# Altium PCB PCB1.PcbDoc
Units mm, origin at the board's own origin, x right, y up, seen from the top; angles counter-clockwise.
Board outline 55 x 25 mm, 2 copper layers (Top Layer, Bottom Layer), stack 1.534 mm thick; 53 components, 42 nets, 188 pads, 70 vias.
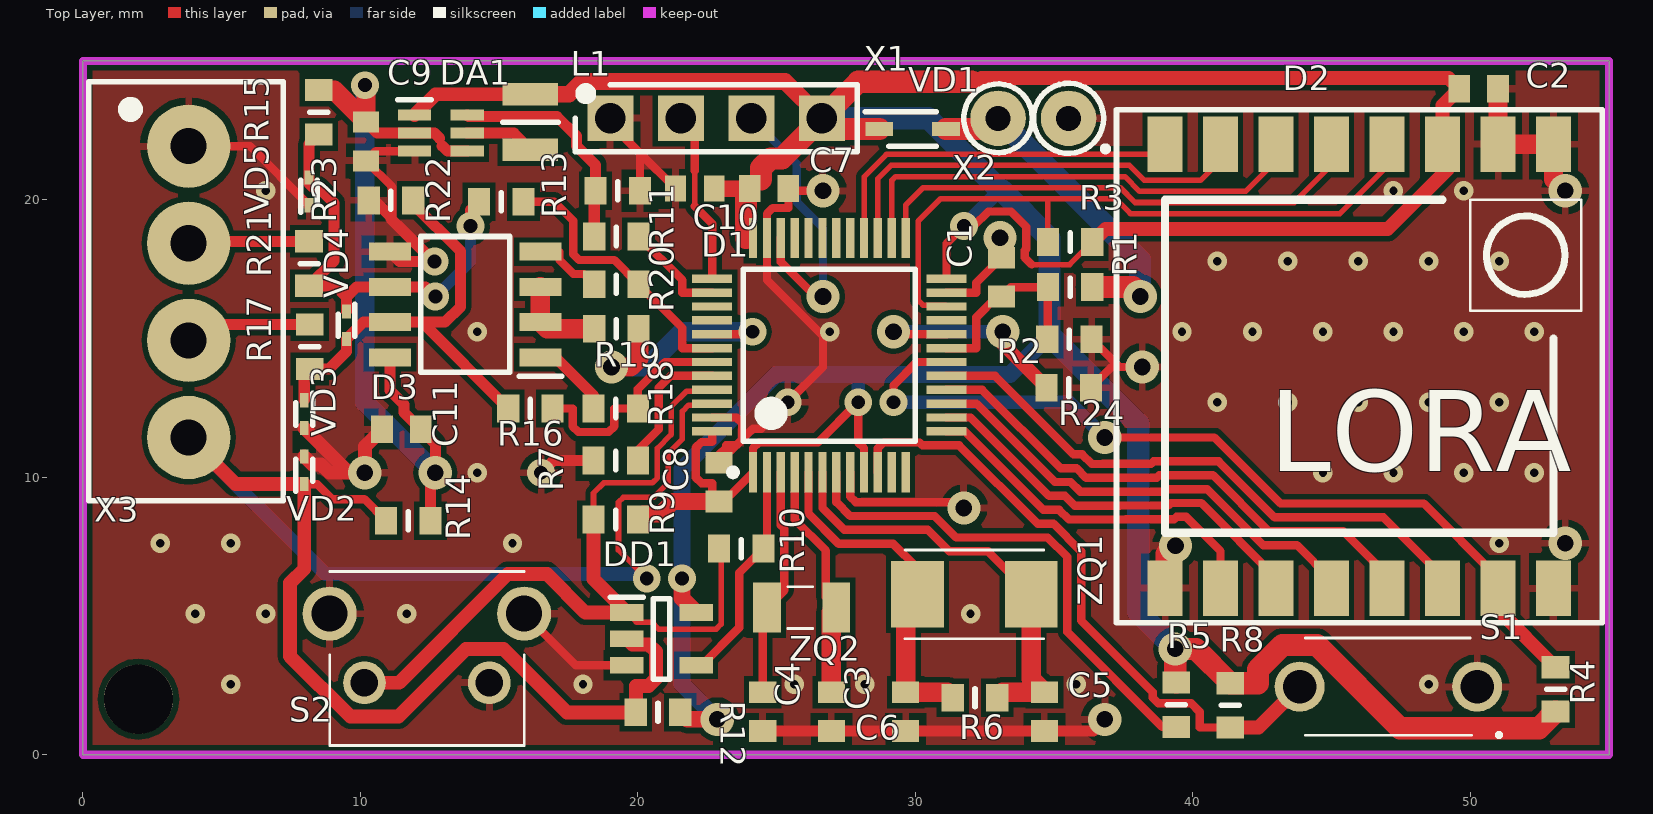
[diagram p0: Top Layer view]
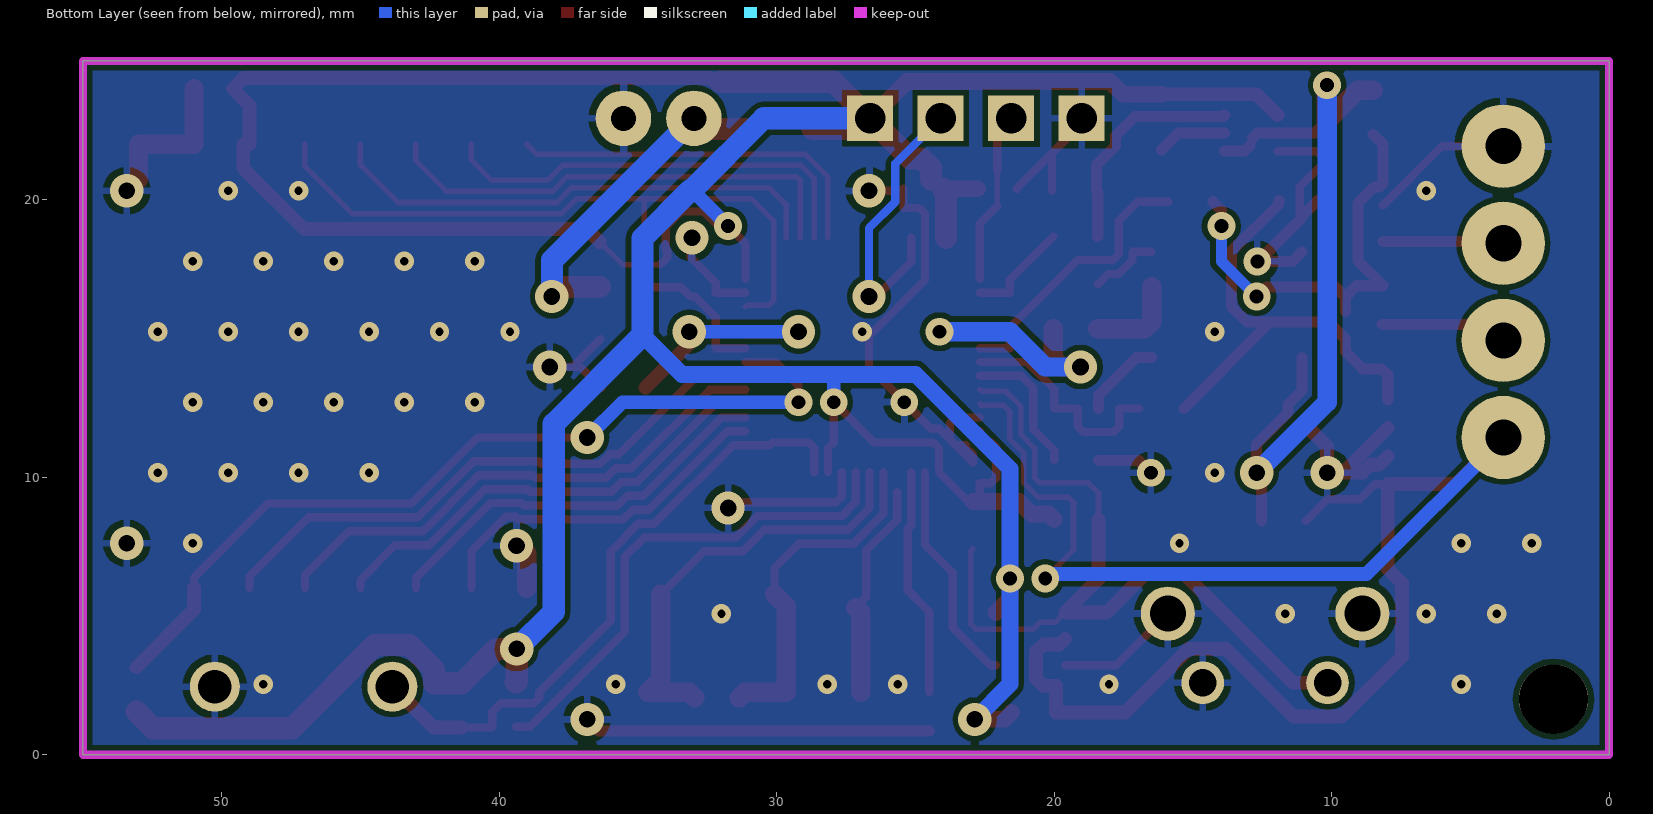
[diagram p1: Bottom Layer view, seen from below]

## Layer stack, top to bottom
Top Solder: solder mask 0.0102, Solder Resist, Dk 3.5
Top Layer: signal copper 0.035
Dielectric 1: dielectric 1.464, FR-4, Dk 4.8
Bottom Layer: signal copper 0.035
Bottom Solder: solder mask 0.0102, Solder Resist, Dk 3.5

## Board outline
0,0 0,25 55,25 55,0

## Design rules (kind name [scope] priority, off if disabled: settings)
Clearance [All] p1: gap=0.2 ignorepadtopadclearanceinfootprint=FALSE except(0: Arc-Hole Track-Hole SMDPad-Hole THPad-Hole Via-Hole Fill-Hole Poly-Hole Region-Hole Text-Hole)
PolygonConnect [All] p1: connectstyle=Relief reliefconductorwidth=0.254 reliefentries=4 polygonreliefangle="90 Angle" airgapwidth=0.254
RoutingVias [All] p1: holewidth=0.711 width=1.27 viastyle="Through Hole" minholewidth=0.3 minwidth=0.6 maxholewidth=0.711 maxwidth=1.27
SolderMaskExpansion [All] p1: expansion=0.15
Width [All] p1: maxlimit=2 minlimit=0.2 preferedwidth=1
30 further rules are at their usual default settings.

## Components (designator, comment, footprint, x,y, rotation, side; value= is the part's Value field where it differs from the comment)
C1 "100nF" CAPC1608X87N 33.1,17.21 r90 top
C2 "100nF" CAPC1608X87N 50.3,24 r180 top
C3 "9pF" CAPC1608X87N 26.975,1.55 r90 top
C4 "9pF" CAPC1608X87N 24.5,1.55 r90 top
C5 "18pF" CAPC1608X87N 34.65,1.55 r90 top
C6 "18pF" CAPC1608X87N 29.65,1.55 r90 top
C7 "100nF" CAPC1608X87N 24.725,20.4 r0 top
C8 "100nF" CAPC1608X87N 22.925,9.825 r90 top
C9 "10uF" CAPC1608X90N 10.2,22.1 r90 top
C10 "10uF" CAPC1608X90N 22.05,20.4 r0 top
C11 "100nF" CAPC1608X87N 11.475,11.725 r0 top
D1 "STM32L072CBT6" LQFP-48N 26.9,14.4 r90 top
D2 "SX1278" "RA-02 LORA" 46,14 r270 top
D3 "ST485CDR" SOIC127P600X175-8N 13.775,16.225 r180 top
DA1 "TPS61222DCKR" SOT65P210X110-6N 12.9,22.4 r0 top
DD1 "SN74AUP1G08DBVR" SOT95P280X145-5N 20.85,4.175 r0 top
L1 "4.7uH" 1239ASH100MP2 16.125,22.8 r270 top
R1 "10M" R0603 35.575,16.85 r0 top
R2 "10M" R0603 35.55,14.975 r180 top
R3 "10M" R0603 35.575,18.475 r0 top
R4 "10M" R0603 53.075,2.35 r270 top
R5 "10M" R0603 39.4,1.8 r270 top
R6 "10M" R0603 32.15,2.05 r180 top
R7 "10M" R0603 19.2,10.6 r180 top
R8 "10M" R0603 41.35,1.775 r90 top
R9 "10M" R0603 19.2,8.475 r0 top
R10 "0" R0603 23.725,7.425 r180 top
R11 "10" R0603 19.225,18.675 r0 top
R12 "10M" R0603 20.725,1.525 r0 top
R13 "10M" R0603 19.275,20.325 r0 top
R14 "0" R0603 11.725,8.425 r180 top
R15 "47k" R0603 8.5,23.15 r90 top
R16 "0" R0603 16.125,12.475 r180 top
R17 "10" R0603 8.175,14.7 r270 top
R18 "10" R0603 19.2,12.475 r0 top
R19 "10" R0603 19.225,15.35 r0 top
R20 "10" R0603 19.225,16.95 r0 top
R21 "10" R0603 8.15,17.7 r270 top
R22 "0" R0603 15.075,19.925 r180 top
R23 "47k" R0603 11.1,19.975 r0 top
R24 "10M" R0603 35.525,13.225 r0 top
S1 "PTS636_SL43_LFS" PTS636SL43LFS 50.25,2.45 r180 top
S2 "FSMRA6JH" FSMRA6JH 10.145,2.59 r0 top
VD1 "NSVR0320MW2T1G" SOD2512X110N 29.9,22.55 r0 top
VD2 "ESD9B5.0ST5G" SODFL1006X40N 7.975,10.25 r90 top
VD3 "ESD9B5.0ST5G" SODFL1006X40N 7.975,12.275 r270 top
VD4 "ESD9B5.0ST5G" SODFL1006X40N 9.5,15.475 r270 top
VD5 "ESD9B5.0ST5G" SODFL1006X40N 8.15,20.3 r90 top
X1 "Value" HDRV1W64P254_1X4_254X241X838P 19.01,22.935 r0 top
X2 "Connector_2" PAD_CONNECTOR_2 34.25,22.935 r180 top
X3 "*" CONECTOR 3.71,16.755 r270 top
ZQ1 "8MHz" ABM38000MHZD2YT 32.125,5.775 r0 top
ZQ2 "32.768k" CM7VT1A32768KHZ125PF10PPMTBQC 25.9,5.3 r180 top

## Footprints (in the part's own frame and the unit in brackets; to place one, negate y for a bottom-side part, rotate by r counter-clockwise, add the part's x,y. Pads: shape width x height; smd on the part's side, far side on the other; paste and mask are expansions set on the pad)
1239ASH100MP2 [mm]
  rect 0.8x2 smd: 1(-1,0) 2(1,0)
  silkscreen extent 0,-1 0,1, body extent -1.25,-1 1.25,1, height 1.2
ABM38000MHZD2YT [mm]
  rect 1.9x2.4 smd: 1(-2.05,0) 2(2.05,0)
  silkscreen extent -2.5,-1.6 2.5,1.6, body extent -2.81,-1.6 2.81,1.6, height 1.1
CAPC1608X87N [mm]
  rect 0.78x0.98 smd: 1(-0.7,0) 2(0.7,0)
  body extent -0.8,-0.4 0.8,0.4, height 0.87
CAPC1608X90N [mm]
  rect 0.75x0.94 smd: 1(-0.7,0) 2(0.7,0)
  body extent -0.8,-0.4 0.8,0.4, height 0.9
CM7VT1A32768KHZ125PF10PPMTBQC [mm]
  rect 1x1.8 smd: 1(-1.25,0) 2(1.25,0)
  silkscreen extent -0.4,-0.75 0.5,0.75, body extent -1.6,-0.75 1.6,0.75, height 0.65
CONECTOR [mm]
  round 3 hole 1.3: 1(-5.175,0.1) 2(-1.675,0.1) 3(1.825,0.1) 4(5.325,0.1)
  silkscreen extent -7.5,-3.5 7.6,3.5, body extent -7.45,-3.47 7.55,3.53, height 8.3
FSMRA6JH [mm]
  round 1.54 hole 0.99: 1(0,0) 2(4.5,0)
  round 1.95 hole 1.3: MH1(-1.255,2.49) MH2(5.755,2.49)
  silkscreen extent -1.25,-2.26 5.75,4.01, body extent -1.4,-5.61 5.71,3.94, height 7.06
HDRV1W64P254_1X4_254X241X838P [mm]
  rect 1.65x1.65 hole 1.1: 1(0,0) 2(2.54,0) 3(5.08,0) 4(7.62,0)
  silkscreen extent -1.27,-1.2 8.89,1.2, body extent -1.27,-1.2 8.89,1.21, height 8.38
LQFP-48N [mm] "TSQFP, 48-Leads, Body 7,00x7,00mm, Pitch 0,50mm, IPC Medium Density"
  rect 1.45x0.3 smd: 1(-4.225,2.75) 2(-4.225,2.25) 3(-4.225,1.75) 4(-4.225,1.25) 5(-4.225,0.75) 6(-4.225,0.25) 7(-4.225,-0.25) 8(-4.225,-0.75) 9(-4.225,-1.25) 10(-4.225,-1.75) 11(-4.225,-2.25) 12(-4.225,-2.75) 25(4.225,-2.75) 26(4.225,-2.25) 27(4.225,-1.75) 28(4.225,-1.25) 29(4.225,-0.75) 30(4.225,-0.25) 31(4.225,0.25) 32(4.225,0.75) 33(4.225,1.25) 34(4.225,1.75) 35(4.225,2.25) 36(4.225,2.75)
  rect 0.3x1.45 smd: 13(-2.75,-4.225) 14(-2.25,-4.225) 15(-1.75,-4.225) 16(-1.25,-4.225) 17(-0.75,-4.225) 18(-0.25,-4.225) 19(0.25,-4.225) 20(0.75,-4.225) 21(1.25,-4.225) 22(1.75,-4.225) 23(2.25,-4.225) 24(2.75,-4.225) 37(2.75,4.225) 38(2.25,4.225) 39(1.75,4.225) 40(1.25,4.225) 41(0.75,4.225) 42(0.25,4.225) 43(-0.25,4.225) 44(-0.75,4.225) 45(-1.25,4.225) 46(-1.75,4.225) 47(-2.25,4.225) 48(-2.75,4.225)
  silkscreen extent -4.35,-3.1 3.1,3.6, body extent -4.5,-4.5 4.5,4.5, height 1.6
PAD_CONNECTOR_2 [mm]
  round 2 hole 0.9: 1(-1.27,0) 2(1.27,0)
  silkscreen extent -2.7,-1.26 2.5,1.26
PTS636SL43LFS [mm]
  round 1.8 hole 1.2: 1(0,0) 2(6.4,0)
  silkscreen extent -0.83,-1.75 6.2,1.78, body extent -0.15,-1.75 6.65,1.75, height 4.5
R0603 [mm]
  rect 0.8x1 smd: 1(-0.8,0) 2(0.8,0)
  silkscreen extent 0,-0.33 0,0.33, body extent -0.77,-0.42 0.78,0.43, height 0.55
"RA-02 LORA" [mm]
  rect 2x1.25 smd: 1(-8,7) 2(-8,5) 3(-8,3) 4(-8,1) 5(-8,-1) 6(-8,-3) 7(-8,-5) 8(-8,-7) 9(8,-7) 10(8,-5) 11(8,-3) 12(8,-1) 13(8,1) 14(8,3) 15(8,5) 16(8,7)
  round 1 on Top Overlay: 17(-10.25,8.25)
  round 0.7 on Top Overlay: 18(-4,6)
  silkscreen extent -9.25,-8.75 9.25,8.75, body extent -8,-8.5 8,8.5, height 3.2
SOD2512X110N [mm]
  rect 1x0.5 smd: 1(-1.2,0) 2(1.2,0)
  silkscreen extent -1.7,-0.63 0.85,0.63, body extent -1.25,-0.63 1.25,0.63, height 1.1
SODFL1006X40N [mm]
  rect 0.51x0.32 smd: 1(-0.5,0) 2(0.5,0)
  silkscreen extent -0.75,-0.3 0.4,0.3, body extent -0.5,-0.3 0.5,0.3, height 0.4
SOIC127P600X175-8N [mm]
  rect 1.525x0.65 smd: 1(-2.712,1.905) 2(-2.712,0.635) 3(-2.712,-0.635) 4(-2.712,-1.905) 5(2.712,-1.905) 6(2.712,-0.635) 7(2.712,0.635) 8(2.712,1.905)
  silkscreen extent -3.47,-2.45 1.6,2.58, body extent -3,-2.45 3,2.45, height 1.75
SOT65P210X110-6N [mm]
  rect 1.2x0.4 smd: 1(-0.95,0.65) 2(-0.95,0) 3(-0.95,-0.65) 4(0.95,-0.65) 5(0.95,0) 6(0.95,0.65)
  silkscreen extent -1.55,1.2 -0.35,1.2, body extent -1.05,-1 1.05,1, height 1.1
SOT95P280X145-5N [mm]
  rect 1.2x0.6 smd: 1(-1.25,0.95) 2(-1.25,0) 3(-1.25,-0.95) 4(1.25,-0.95) 5(1.25,0.95)
  silkscreen extent -1.85,-1.45 0.3,1.5, body extent -1.4,-1.45 1.4,1.45, height 1.45

## Part data
C1 C2 C7 C8 C11: library part Capacitor, Case=0603, Manufacture="Murata Electronics", helpURL=https://eu.mouser.com/ProductDetail/Murata-Electronics/GCJ188R71C104MA01D?qs=sGAEpiMZZMs0AnBnWHyRQID2xuQsFd1GofHLF%2FZjZNHccNCeYysMBg%3D%3D, Model=GCJ188R71C104MA01D
C3 C4: library part C0603C220F3HACTU, "Capacitor", Case=0603, Manufacturer_Name="Murata Electronics", Manufacturer_Part_Number=GRM1885C1H9R0DA01D, Height=0.87mm, helpURL=https://eu.mouser.com/ProductDetail/Murata-Electronics/GRM1885C1H9R0DA01D?qs=sGAEpiMZZMs0AnBnWHyRQOYRcarA5hN2DPY65XhHy0U%3D, Model=GRM1885C1H9R0DA01D
C5 C6: library part C0603C220F3HACTU, "Capacitor", Case=0603, Manufacturer_Name=Kemet, Mouser2 Part Number=80-C0603C220F3HACTU, Height=0.87mm, helpURL=https://eu.mouser.com/ProductDetail/KEMET/C0603C180F3HACTU?qs=%2Fha2pyFadujq8NkOLYRmmNwJI7kFslpOt8gdR0UiXQGw%2Fa53lDXJFQ%3D%3D, Manufacturer_Part_Number=C0603C220F3HACTU, Model=C0603C220F3HACTU
C9 C10: library part GRM188R60J106ME84J, "Capacitor", Manufacture="Murata Electronics", Mouser2 Part Number=81-GRM188R60J106ME4J, Height=0.9mm, helpURL=https://eu.mouser.com/ProductDetail/Murata-Electronics/GRM188R60J106ME84J?qs=sGAEpiMZZMs0AnBnWHyRQPhvn0V5nV7wdlV22aTabXS5iZ%252BKGPaWdQ%3D%3D, Manufacturer_Name="Murata Electronics", Manufacturer_Part_Number=GRM188R60J106ME84J, Model=GRM188R60J106ME84J
D1: "ARM Cortex M0+, 128 KB,  32 MHz", Case=48-LQFP, Manufacture=ST, helpURL=https://www.st.com/en/microcontrollers-microprocessors/stm32l072cb.htmhttps://www.st.com/en/microcontrollers-microprocessors/stm32l072cb.html, Model=STM32L072CBT6
D2: "Wireless Modules RoHS, Lora, 433 MHz", Case=Customer, Manufacture=Ai-Thinker, helpURL=https://lcsc.com/product-detail/Wireless-Modules_SX1278LoRaWireless-Modules-Long10KM-433_C90039.html, Model=SX1278
D3: "Integrated Circuit", Manufacturer_Name=STMicroelectronics, Mouser2 Part Number=511-ST485CDR, Datasheet Link=https://componentsearchengine.com/Datasheets/1/ST485CDR.pdf, Height=1.75mm, Manufacturer_Part_Number=ST485CDR, Model=ST485CDR, Mouser2 Price/Stock=https://www.mouser.com/Search/Refine.aspx?Keyword=511-ST485CDR
DA1: "Integrated Circuit", Manufacturer_Name="Texas Instruments", Mouser2 Part Number=595-TPS61222DCKR, Datasheet Link=https://www.ti.com/lit/gpn/TPS61222, Height=1.1mm, Manufacturer_Part_Number=TPS61222DCKR, Mouser2 Price/Stock=https://www.mouser.com/Search/Refine.aspx?Keyword=595-TPS61222DCKR
DD1: "Integrated Circuit", Manufacturer_Name="Texas Instruments", Datasheet Link=http://www.ti.com/lit/gpn/sn74aup1g08, Height=1.45mm, Manufacturer_Part_Number=SN74AUP1G08DBVR, Model=SN74AUP1G08DBVR
L1: library part Cooil, Manufacture=Coilcraft, helpURL=https://eu.mouser.com/ProductDetail/Coilcraft/EPL3015-472MLB?qs=sGAEpiMZZMsg%252By3WlYCkU2kWFds1hA9DlWz4EahPFXQ%3D, Model=EPL3015-472MLB
R1 R2 R3 R4 R5 R6 R7 R8 R9 R10 R11 R12 R13 R14 R16 R17 R18 R19 R20 R21 R22 R24: library part Resistor, Case=0603, Manufacture="Vishay / Dale"
  R1 R2 R3 R4 R5 R6 R7 R8 R9 R12 R13 R24: helpURL=https://eu.mouser.com/ProductDetail/Vishay-Dale/CRCW060310M0JNEAC?qs=sGAEpiMZZMtlubZbdhIBIIZe04wfiaJWqGwkA21tjII%3D, Model=CRCW060310M0JNEAC
  R10 R14 R16 R22: helpURL=https://eu.mouser.com/ProductDetail/Vishay-Dale/CRCW06030000Z0EAC?qs=sGAEpiMZZMtlubZbdhIBIIZe04wfiaJWEAUMew4TANc%3D, Model=CRCW06030000Z0EAC
  R11 R17 R18 R19 R20 R21: helpURL=https://eu.mouser.com/ProductDetail/Vishay-Dale/CRCW060310R0FKEAC?qs=sGAEpiMZZMtlubZbdhIBIIZe04wfiaJWxDMmtLhgrug%3D, Model=CRCW060310R0FKEAC
R15 R23: library part Resistor, Case=0603, Manufacture=Yageo, helpURL=https://eu.mouser.com/ProductDetail/Yageo/RC0603FR-0747KL?qs=sGAEpiMZZMtlubZbdhIBIItYu4jZFrq8jA1HT%252B9Khos%3D, Model=RC0603FR-0747KL
S1: "Switch", Manufacturer_Name="C & K COMPONENTS", Manufacturer_Part_Number="PTS636 SL43 LFS", Mouser2 Part Number=611-PTS636SL43LFS, Datasheet Link="https://componentsearchengine.com/Datasheets/1/PTS636 SL43 LFS.pdf", Height=4.5mm, Model="PTS636 SL43 LFS", Mouser2 Price/Stock=https://www.mouser.com/Search/Refine.aspx?Keyword=611-PTS636SL43LFS
S2: "Switch", Manufacturer_Name="TE Connectivity", Height=7.01mm, helpURL=https://eu.mouser.com/ProductDetail/TE-Connectivity-PB/FSMRA6JH?qs=sGAEpiMZZMsgGjVA3toVBAK0o4DxfcqiZ%2FRlJR1iziM%3D, Manufacturer_Part_Number=FSMRA6JH, Model=FSMRA6JH
VD1: "Diode", Manufacturer_Name="ON Semiconductor", Datasheet Link=https://componentsearchengine.com/Datasheets/2/NSVR0320MW2T1G.pdf, Height=1.1mm, helpURL=https://eu.mouser.com/ProductDetail/ON-Semiconductor/NSVR0320MW2T1G?qs=%2Fha2pyFadujuJRQwCWoVTOD2UGuwG1BWdFMULlJZ9zj6n5RYExZtWw%3D%3D, Manufacturer_Part_Number=NSVR0320MW2T1G, Model=NSVR0320MW2T1G
VD2 VD3 VD4 VD5: "Diode", Manufacture="ON Semiconductor", Mouser2 Part Number=863-ESD9B5.0ST5G, Height=0.4mm, helpURL=https://www.mouser.com/Search/Refine.aspx?Keyword=863-ESD9B5.0ST5G, Manufacturer_Name="ON Semiconductor", Manufacturer_Part_Number=ESD9B5.0ST5G, Model=ESD9B5.0ST5G
X1 X3: library part Connector, Case="Terminal Bloak", Manufacture="TE Connectivity AMP Connectors", Part number=1776275-4, helpURL=https://www.digikey.com/product-detail/en/te-connectivity-amp-connectors/1776275-4/A98038-ND/1826901, Model=1776275-4
ZQ1: library part ABM3-8.000MHZ-B4Y-T, "Crystal or Oscillator", Manufacturer_Name=ABRACON, Height=1mm, helpURL=https://eu.mouser.com/ProductDetail/ABRACON/ABM3-8000MHZ-B4Y-T?qs=%252BlF%252B75lapNKxd1hbTYfShQ%3D%3D, Manufacturer_Part_Number=ABM3-8.000MHZ-B4Y-T, Model=ABM3-8.000MHZ-B4Y-T
ZQ2: library part CM7V-T1A-32.768k-9pF-20PPM-TA-QA_T3, "Crystal or Oscillator", Manufacturer_Name="MICRO CRYSTAL", Manufacturer_Part_Number="CM7V-T1A-32.768k-9pF-20PPM-TA-QA T3", Mouser2 Part Number=428-201568-MG03, Height=0.65mm, helpURL=https://eu.mouser.com/ProductDetail/Micro-Crystal/CM7V-T1A-32768k-9pF-20PPM-TA-QA-T3?qs=%2Fha2pyFadui6AXBQ%2FVw18lA%252BLN0M9oEZsmyoRLoeGfq%2FVECMncxUBFCE3nNdh4yClz3k2BoauApbLLycflu%2FdA%3D%3D, Model="CM7V-T1A-32.768k-9pF-20PPM-TA-QA T3", Mouser2 Price/Stock=https://www.mouser.com/Search/Refine.aspx?Keyword=428-201568-MG03

## Free pads (board coordinates)
  round 2.5 hole 2.5: 5(2,2)

## Via types
v1: diameter 0.7, hole 0.3, Top Layer to Bottom Layer, tented both sides, 40 vias
v2: diameter 1.2, hole 0.6, Top Layer to Bottom Layer, tented both sides, 18 vias
v3: diameter 1, hole 0.5, Top Layer to Bottom Layer, tented both sides, 12 vias

## Nets (pads, with @x,y where several pads share a name; then routed paths per layer and width w, separated by ;. In a path a pad name is that pad's centre, name@x,y a point inside that pad or via, vN(x,y) a via of type N, cw(c..) or ccw(c..) an arc to the next point about the centre after c; other vN are vias at no path point)
5V: C9.2 C11.2 D3.8 DA1.2 DA1.4 R14.1 R15.2 | length 29.1
  Top Layer w0.4: C9.2 10.6,22.4 DA1.2 12.666,22.4 12.85,22.216 ; D3.8 11.063,13.117 11.565,12.615 11.565,12.335 C11.2 12.7,11.2 v2(12.7,10.16) 12.525,9.985 R14.1 ; 12.95,21.934 13.134,21.75 DA1.4
  Top Layer w0.7: R15.2 9.05,23.95 C9.2 10.2,24.09 v3(10.16,24.13)
  Bottom Layer w0.7: v3(10.16,24.13) 10.16,12.7 v2(12.7,10.16)
BOOT1: D1.20 R24.1 | length 8.6
  Top Layer w0.3: v2(29.21,15.24) 29.3,15.15 D1.20
  Top Layer w0.5: v2(33.15,15.24) 33.15,14.8 R24.1
  Bottom Layer w0.5: v2(29.21,15.24) v2(33.15,15.24)
COM_PWR_EN: D1.38 R11.2 | length 3.8
  Top Layer w0.3: R11.2 21.6,17.1 21.6,16.65 D1.38
COUNTER: D1.46 DD1.2 R12.1 R14.2 VD2.1 X3.4 | length 61.9
  Top Layer w0.2: v3(20.32,6.35) 19.3,7.37 19.3,9.099 19.476,9.275 20.565,9.275 21.1,9.81 21.1,10.873 21.6,11.373 21.6,12.374 21.826,12.6 22.625,12.6 D1.46
  Top Layer w0.3: VD2.1 8.441,9.75 8.981,9.21 10.14,9.21 R14.2
  Top Layer w0.5: X3.4 5.49,9.75 VD2.1 7.975,6.69 7.465,6.18 7.465,3.545 9.64,1.37 11.365,1.37 13.805,3.81 15.155,3.81 17.44,1.525 R12.1 19.925,2.475 20.386,2.475 20.65,2.739 20.65,3.711 20.386,3.975 19.8,3.975 DD1.2
  Bottom Layer w0.5: X3.4 8.735,6.505 20.165,6.505 v3(20.32,6.35)
GND: C1.2 C2.1 C3.1 C4.1 C5.1 C6.1 C7.2 C8.2 C9.1 C10.1 C11.1 D1.8 D1.23 D1.35 D1.47 D2.1 D2.2 D2.9 D2.16 D3.5 DA1.3 DD1.3 R2.1 R7.2 R13.2 R23.1 R24.2 S1.1 S2.2 S2.MH1 S2.MH2 VD2.2 VD3.2 VD5.1 X1.1 X2.1 X3.1 | length 84.7
  Top Layer w0.3: X3.1 6.02,21.93 VD5.1 ; DA1.3 10.55,21.75 C9.1 11.15,20.45 11.15,19.33 11.355,19.125 11.368,19.125 12.7,17.793 12.683,17.776 v3(12.676,17.776) ; S2.MH2 17.755,3.225 DD1.3 ; X1.1 19.01,22.74 20.075,21.675 ; R13.2 20.075,21.675 ; C10.1 20.075,21.675 ; D1.47 23.545,12.15 23.75,11.945 23.75,11.355 23.545,11.15 23.175,11.15 23.175,11.058 22.925,10.808 C8.2 23.65,11.25 23.65,11.252 24.148,11.75 24.45,11.75 v3(25.4,12.7) 26.67,13.97 26.67,15.084 24.65,17.104 D1.35 24.65,19.495 24.855,19.7 25.425,19.7 C7.2 25.505,20.32 v2(26.67,20.32) ; D1.8 27.65,9.305 27.855,9.1 31.54,9.1 v2(31.75,8.89) ; D1.23 32.2,16.65 32.2,17.01 C1.2 33.1,18.724 33.052,18.676 v2(33.052,18.626) ; R24.2 37.07,13.97 37.355,13.97 ; R2.1 37.355,13.97 ; v2(38.18,13.97) 37.355,13.97
  Top Layer w0.4: R23.1 10.505,19.975 11.1,19.38 11.1,19.309 v3@12.629,17.78 ; D3.5 11.413,17.78 v3@12.629,17.78 ; v3(12.676,17.776) 12.633,17.776 v3@12.629,17.78 ; v3(16.51,10.16) 16.95,10.6 R7.2 ; C4.1 C3.1 C6.1 C5.1 36.41,0.85 v2(36.83,1.27)
  Top Layer w0.5: VD2.2 8.27,10.455 8.585,10.455 8.88,10.16 v2@9.59,10.16 ; VD3.2 v2@9.59,10.16 ; C11.1 10.16,11.11 v2(10.16,10.16) v2@9.59,10.16
  Top Layer w0.7: D2.9 39,7.25 39.275,7.525 v2(39.377,7.525) ; C2.1 D2.2 D2.1 53,20.74 v2(53.42,20.32)
  other v1: 5.32,2.54 18.02,2.54 25.64,2.54 28.18,2.54 35.8,2.54 48.5,2.54 4.05,5.08 6.59,5.08 11.67,5.08 31.99,5.08 2.78,7.62 5.32,7.62 15.48,7.62 51.04,7.62 14.21,10.16 44.69,10.16 47.23,10.16 49.77,10.16 52.31,10.16 40.88,12.7 43.42,12.7 45.96,12.7 48.5,12.7 51.04,12.7 14.21,15.24 26.91,15.24 39.61,15.24 42.15,15.24 44.69,15.24 47.23,15.24 49.77,15.24 52.31,15.24 40.88,17.78 43.42,17.78 45.96,17.78 48.5,17.78 51.04,17.78 6.59,20.32 47.23,20.32 49.77,20.32
  other v2: 53.42,7.62
NetC3_2: C3.2 D1.4 ZQ2.1 | length 7.9
  Top Layer w0.3: D1.4@25.65,9.457 25.65,8.477 26.775,7.352 26.775,5.675 ZQ2.1
  Top Layer w0.7: C3.2 26.975,5.125 ZQ2.1
NetC4_2: C4.2 D1.3 ZQ2.2 | length 8.3
  Top Layer w0.3: C4.2 24.5,5.15 ZQ2.2 25.275,5.925 25.275,8.145 25.15,8.27 D1.3
NetC5_2: C5.2 D1.6 R6.1 ZQ1.2 | length 15.6
  Top Layer w0.3: D1.6 26.65,8.891 27.441,8.1 30.45,8.1 31.225,7.325 32.625,7.325 ZQ1.2
  Top Layer w0.7: R6.1 33.15,2.25 C5.2 34.175,2.725 ZQ1.2
NetC6_2: C6.2 D1.5 R6.2 ZQ1.1 | length 12.7
  Top Layer w0.3: D1.5 26.15,8.684 27.234,7.6 29.2,7.6 30.075,6.725 ZQ1.1
  Top Layer w0.7: ZQ1.1 29.65,5.35 C6.2 31.15,2.25 R6.2
NetD1_7: D1.7 R5.2 | length 18.3
  Top Layer w0.3: D1.7 27.15,9.098 27.648,8.6 30.696,8.6 31.471,7.825 34.77,7.825 35.475,7.12 35.475,4.423 38.898,1 R5.2
NetD1_44: D1.44 R7.1 | length 5
  Top Layer w0.3: R7.1 20,10.975 20.75,11.725 20.75,13.218 21.182,13.65 D1.44
NetD3_1: D3.1 R18.1 | length 3
  Top Layer w0.4: D3.1 17.03,14.32 18.4,12.95 R18.1
NetD3_2: D3.2 D3.3 R19.1 | length 3.3
  Top Layer w0.7: D3.3 D3.2 16.727,15.35 R19.1
NetD3_4: D3.4 R20.1 | length 2.6
  Top Layer w0.3: D3.4 17.175,18.13 17.175,17.823 17.673,17.325 18.05,17.325 R20.1
NetD3_6: D3.6 R15.1 R21.2 R22.2 VD4.1 VD5.2 | length 16.1
  Top Layer w0.4: R15.1 8.15,22 VD5.2 8.15,20.578 8.273,20.455 8.476,20.455 9.05,19.881 9.05,17.8 R21.2 9.1,16.9 9.5,16.5 ; VD4.1 9.5,16.5 ; v3(12.7,16.51) 12.35,16.86 D3.6 9.86,16.86 9.5,16.5 ; v3(13.97,19.05) 13.97,19.62 R22.2
  Bottom Layer w0.4: v3(12.7,16.51) 13.97,17.78 v3(13.97,19.05)
NetD3_7: D3.7 R16.2 R17.2 R23.2 VD3.1 VD4.2 | length 16.8
  Top Layer w0.4: VD3.1 7.975,13.7 R17.2 8.875,13.9 9.5,14.525 VD4.2 10.115,15.59 D3.7 12.21,15.59 ; R23.2 11.9,19.847 13.6,18.147 13.6,16.137 13.053,15.59 12.21,15.59 ; R16.2 12.21,15.59
NetDA1_5: DA1.5 L1.2 | length 2.5
  Top Layer w0.4: DA1.5 15.525,22.4 L1.2
NetDA1_6: DA1.6 R11.1 R13.1 | length 8.2
  Top Layer w0.4: DA1.6 13.9,23 17.075,23 17.785,22.29 17.785,21.944 18.475,21.254 R13.1 18.425,20.275 R11.1
NetR1_2: R1.2 VD1.2 X2.2 | length 12.5
  Top Layer w0.8: VD1.2 32.595,22.55 X2.2 ; R1.2 37.84,16.85 38.1,16.59 v2(38.1,16.51)
  Bottom Layer w0.8: X2.2 38.1,17.815 v2(38.1,16.51)
NetR17_1: R17.1 X3.3 | length 4.6
  Top Layer w0.4: X3.3 4.38,15.5 R17.1
NetR21_1: R21.1 X3.2 | length 4.4
  Top Layer w0.4: X3.2 3.88,18.5 R21.1
OPEN_CASE: D1.10 R8.1 S1.2 | length 22.9
  Top Layer w0.3: D1.10 28.65,11.045 28.855,11.25 30.155,11.25 30.255,11.15 31.581,11.15 34.406,8.325 34.977,8.325 35.975,7.327 35.975,4.832 38.55,2.257 38.55,2.055 38.755,1.85 39.945,1.85 40.25,1.545 40.25,0.975 R8.1
  Top Layer w0.5: R8.1 42.375,0.975 S1.2
START_SETTING: D1.45 DD1.1 R9.1 R10.2 S2.1 | length 29.9
  Top Layer w0.2: R9.1 18.4,9.425 18.775,9.8 20.524,9.8 20.7,9.976 20.7,11.039 21.2,11.539 21.2,12.54 21.76,13.1 22.625,13.1 D1.45 ; DD1.1 19.95,4.775 20.5,4.775 20.75,4.525 22.824,4.525 23,4.701 23,7.35 R10.2
  Top Layer w0.5: S2.1 11.395,2.59 15.31,6.505 16.72,6.505 18.1,5.125 DD1.1 18.4,6.325 R9.1
SX127x_DIO0: D1.25 D2.5 | length 18.3
  Top Layer w0.2: D1.25 29.65,19.8 30.285,20.435 37.384,20.435 37.919,19.9 43.65,19.9 45,21.25 D2.5
SX127x_DIO1: D1.26 D2.6 | length 17.3
  Top Layer w0.2: D1.26 29.15,20.694 29.291,20.835 37.55,20.835 38.085,20.3 41.9,20.3 43,21.4 D2.6
SX127x_DIO2: D1.27 D2.7 | length 15.8
  Top Layer w0.2: D1.27 28.65,20.759 29.126,21.235 37.716,21.235 38.251,20.7 40.275,20.7 41,21.425 D2.7
SX127x_DIO3: D1.28 D2.8 | length 13.5
  Top Layer w0.2: D1.28 28.15,20.825 28.96,21.635 38.635,21.635 D2.8
SX127x_DIO4: D1.13 D2.10 | length 13.1
  Top Layer w0.3: D1.13 31.788,11.65 34.613,8.825 35.184,8.825 35.534,8.475 37.578,8.475 37.583,8.48 39.322,8.48 39.412,8.57 39.764,8.57 41,7.334 D2.10
SX127x_DIO5: D1.14 D2.11 | length 14.7
  Top Layer w0.3: D1.14 31.995,12.15 34.82,9.325 35.391,9.325 35.741,8.975 37.371,8.975 37.376,8.98 39.115,8.98 39.205,9.07 40.305,9.07 43,6.375 D2.11
SX127x_MISO: D1.16 D2.13 | length 19.2
  Top Layer w0.3: D1.16 31.738,13.15 32.409,13.15 35.234,10.325 35.805,10.325 36.155,9.975 36.957,9.975 36.962,9.98 38.701,9.98 38.791,10.07 40.723,10.07 42.743,8.05 45.425,8.05 47,6.475 D2.13
SX127x_MOSI: D1.17 D2.14 | length 21.4
  Top Layer w0.3: D1.17 31.995,13.65 32.202,13.65 32.875,13.65 35.7,10.825 36.013,10.825 36.363,10.475 36.75,10.475 36.755,10.48 38.494,10.48 38.583,10.57 40.93,10.57 42.95,8.55 46.875,8.55 49,6.425 D2.14
SX127x_NSS: D1.18 D2.15 R4.1 | length 31.4
  Top Layer w0.3: v3(29.21,12.7) 29.21,13.31 30.05,14.15 D1.18 ; v2(36.83,11.43) 40.777,11.43 43.157,9.05 48.325,9.05 51,6.375 D2.15
  Top Layer w0.5: D2.15 51,5.225 R4.1
  Bottom Layer w0.5: v3(29.21,12.7) 35.56,12.7 v2(36.83,11.43)
SX127x_RESET: D1.22 D2.4 R3.1 | length 24.5
  Top Layer w0.2: D1.22 31.075,16.2 30.276,16.2 30.1,16.376 30.1,19.225 30.91,20.035 34.75,20.035 ; R3.1 34.775,20.01 34.75,20.035 ; D2.4 47,21.2 45.3,19.5 37.754,19.5 37.219,20.035 34.75,20.035
SX127x_SCK: D1.15 D2.12 | length 16.9
  Top Layer w0.3: D1.15 32.202,12.65 35.027,9.825 35.598,9.825 35.948,9.475 37.164,9.475 37.169,9.48 38.908,9.48 38.998,9.57 40.516,9.57 42.536,7.55 43.75,7.55 45,6.3 D2.12
SYS_SWCLK: D1.37 X1.2 | length 6.2
  Top Layer w0.2: 22.05,19.76 22.05,20.969
  Top Layer w0.3: X1.2 22.05,22.435 22.05,21.04 ; 22.05,19.76 22.675,19.135 D1.37
SYS_SWDIO: D1.34 X1.3 | length 10.4
  Top Layer w0.3: D1.34 25.15,17.755 26.395,16.51 v2(26.67,16.51)
  Bottom Layer w0.3: X1.3 25.72,21.305 25.72,19.926 26.67,18.976 v2(26.67,16.51)
UART_RE: D1.41 R19.2 | length 9.3
  Top Layer w0.3: D1.41 24.04,15.15 v3(24.13,15.24)
  Top Layer w0.7: v2(19.05,13.97) 19.73,13.97 20.025,14.265 R19.2
  Bottom Layer w0.7: v2(19.05,13.97) 20.32,13.97 21.59,15.24 v3(24.13,15.24)
UART_RX: D1.43 R16.1 R18.2 | length 8.3
  Top Layer w0.3: R16.1 17.65,12.475 17.65,11.83 17.855,11.625 18.945,11.625 19.15,11.83 19.15,12.475 R18.2 20,13.175 20.975,14.15 D1.43
UART_TX: D1.42 R20.2 R22.1 | length 10.1
  Top Layer w0.3: R22.1 16.987,19.925 17.675,19.237 17.675,18.03 17.88,17.825 19.15,17.825 R20.2 21.6,15.375 21.6,14.65 D1.42
Vbat: C1.1 D1.19 R1.1 R2.2 | length 7.1
  Top Layer w0.3: D1.19 32.2,14.65 32.2,14.716 32.2,14.855 32.2,15.764 32.946,16.51 C1.1 33.44,16.85 R1.1 34.775,15 R2.2
VCC: C2.2 C7.1 C8.1 C10.2 D1.1 D1.9 D1.24 D1.36 D1.48 D2.3 DA1.1 DD1.5 L1.1 R3.2 R4.2 R5.1 R8.2 R9.2 R12.2 VD1.1 X1.4 | length 165.9
  Top Layer w0.2: 34.193,17.662 35.562,17.662 R3.2
  Top Layer w0.3: D1.48 22.675,11.265 22.29,11.265 22.085,11.06 22.085,9.99 22.29,9.785 22.675,9.785 22.675,9.375 C8.1 23.1,9.125 D1.1 24.15,11.045 24.355,11.25 26.49,11.25 v3(27.94,12.7) 27.94,11.255 28.15,11.045 D1.9 ; D1.24 31.125,18.425 v3(31.75,19.05) 32.102,19.05 32.628,19.576 33.445,19.576 34.002,19.019 34.002,18.232 33.94,18.171 33.94,17.915 34.193,17.662
  Top Layer w0.4: 23.9,18.625 D1.36@24.1,18.625
  Top Layer w0.5: DA1.1 12.7,23.8 L1.1 ; 32.032,24.25 32.244,24.25 32.379,24.385 49.215,24.385 C2.2 49,23.4 D2.3 49.225,22 49.225,21.15 47.025,18.95 36.85,18.95 R3.2
  Top Layer w0.6: L1.1 17.518,23.8 17.978,24.26 25.305,24.26 X1.4 ; R9.2 20.2,8.675 20.813,8.675 21.263,9.125 C8.1 ; R12.2 21.78,1.27 v2(22.86,1.27) ; v3(21.59,6.35) 21.59,5.635 DD1.5 ; C10.2 C7.1
  Top Layer w0.8: 23.9,18.625 23.9,20.275 C7.1 ; 24.435,20.74 24.435,21.139 24.786,21.49 25.185,21.49 X1.4 ; VD1.1 27.015,22.55 X1.4 ; 32.032,24.25 27.945,24.25 X1.4 ; R5.1 39.37,2.63 v2(39.37,3.81) 40.115,3.81 R8.2 42.35,2.575 42.35,3.071 43.229,3.95 44.471,3.95 47.471,0.95 52.475,0.95 R4.2
  Bottom Layer w0.5: v3(27.94,12.7) 27.94,13.665 27.975,13.7 ; v3(31.75,19.05) 33.05,20.35 33.1,20.35
  Bottom Layer w0.6: v2(22.86,1.27) 21.59,2.54 v3(21.59,6.35) 21.59,10.304 24.986,13.7 27.975,13.7 33.418,13.7 34.837,15.12
  Bottom Layer w0.8: X1.4 30.465,22.935 33.05,20.35 ; 33.1,20.35 34.837,18.613 34.837,15.12 38.03,11.927 38.03,5.15 v2(39.37,3.81)
WKUP1: D1.2 DD1.4 R10.1 | length 8.1
  Top Layer w0.3: DD1.4 22.302,3.225 23.65,4.573 23.65,6.55 R10.1 24.65,7.55 D1.2
pads on no net: D1.11 D1.12 D1.21 D1.29 D1.30 D1.31 D1.32 D1.33 D1.39 D1.40 D2.17 D2.18

## Polygon pours and split planes (outlines as drawn)
GND on Bottom Layer "Bottom_Layer-GND" (solid, remove dead copper, pour order 0): 0,0 0,25 55,25 55,0
GND on Top Layer "Top Layer-GND" (solid, remove dead copper, pour order 1): 0,0 0,25 55,25 55,0

## Keep-outs
Keep-Out Layer:
  lines w0.3: 0,0 0,25 55,25 55,0 37.5,0 28.375,0 11.625,0 2.5,0 0,0

## Text inside footprints (layer, text, board x,y; h text height)
D2: Top Overlay "LORA" at 42.75,9.25 h5